# Altium PCB PadaukAudioBoard.PcbDoc
Units mm, origin at the board's own origin, x right, y up, seen from the top; angles counter-clockwise.
Board outline 98.99 x 99.67 mm, 2 copper layers (Top Layer, Bottom Layer); 52 components, 39 nets, 212 pads, 26 vias.
Unrouted connection lines stored in the file: 2.
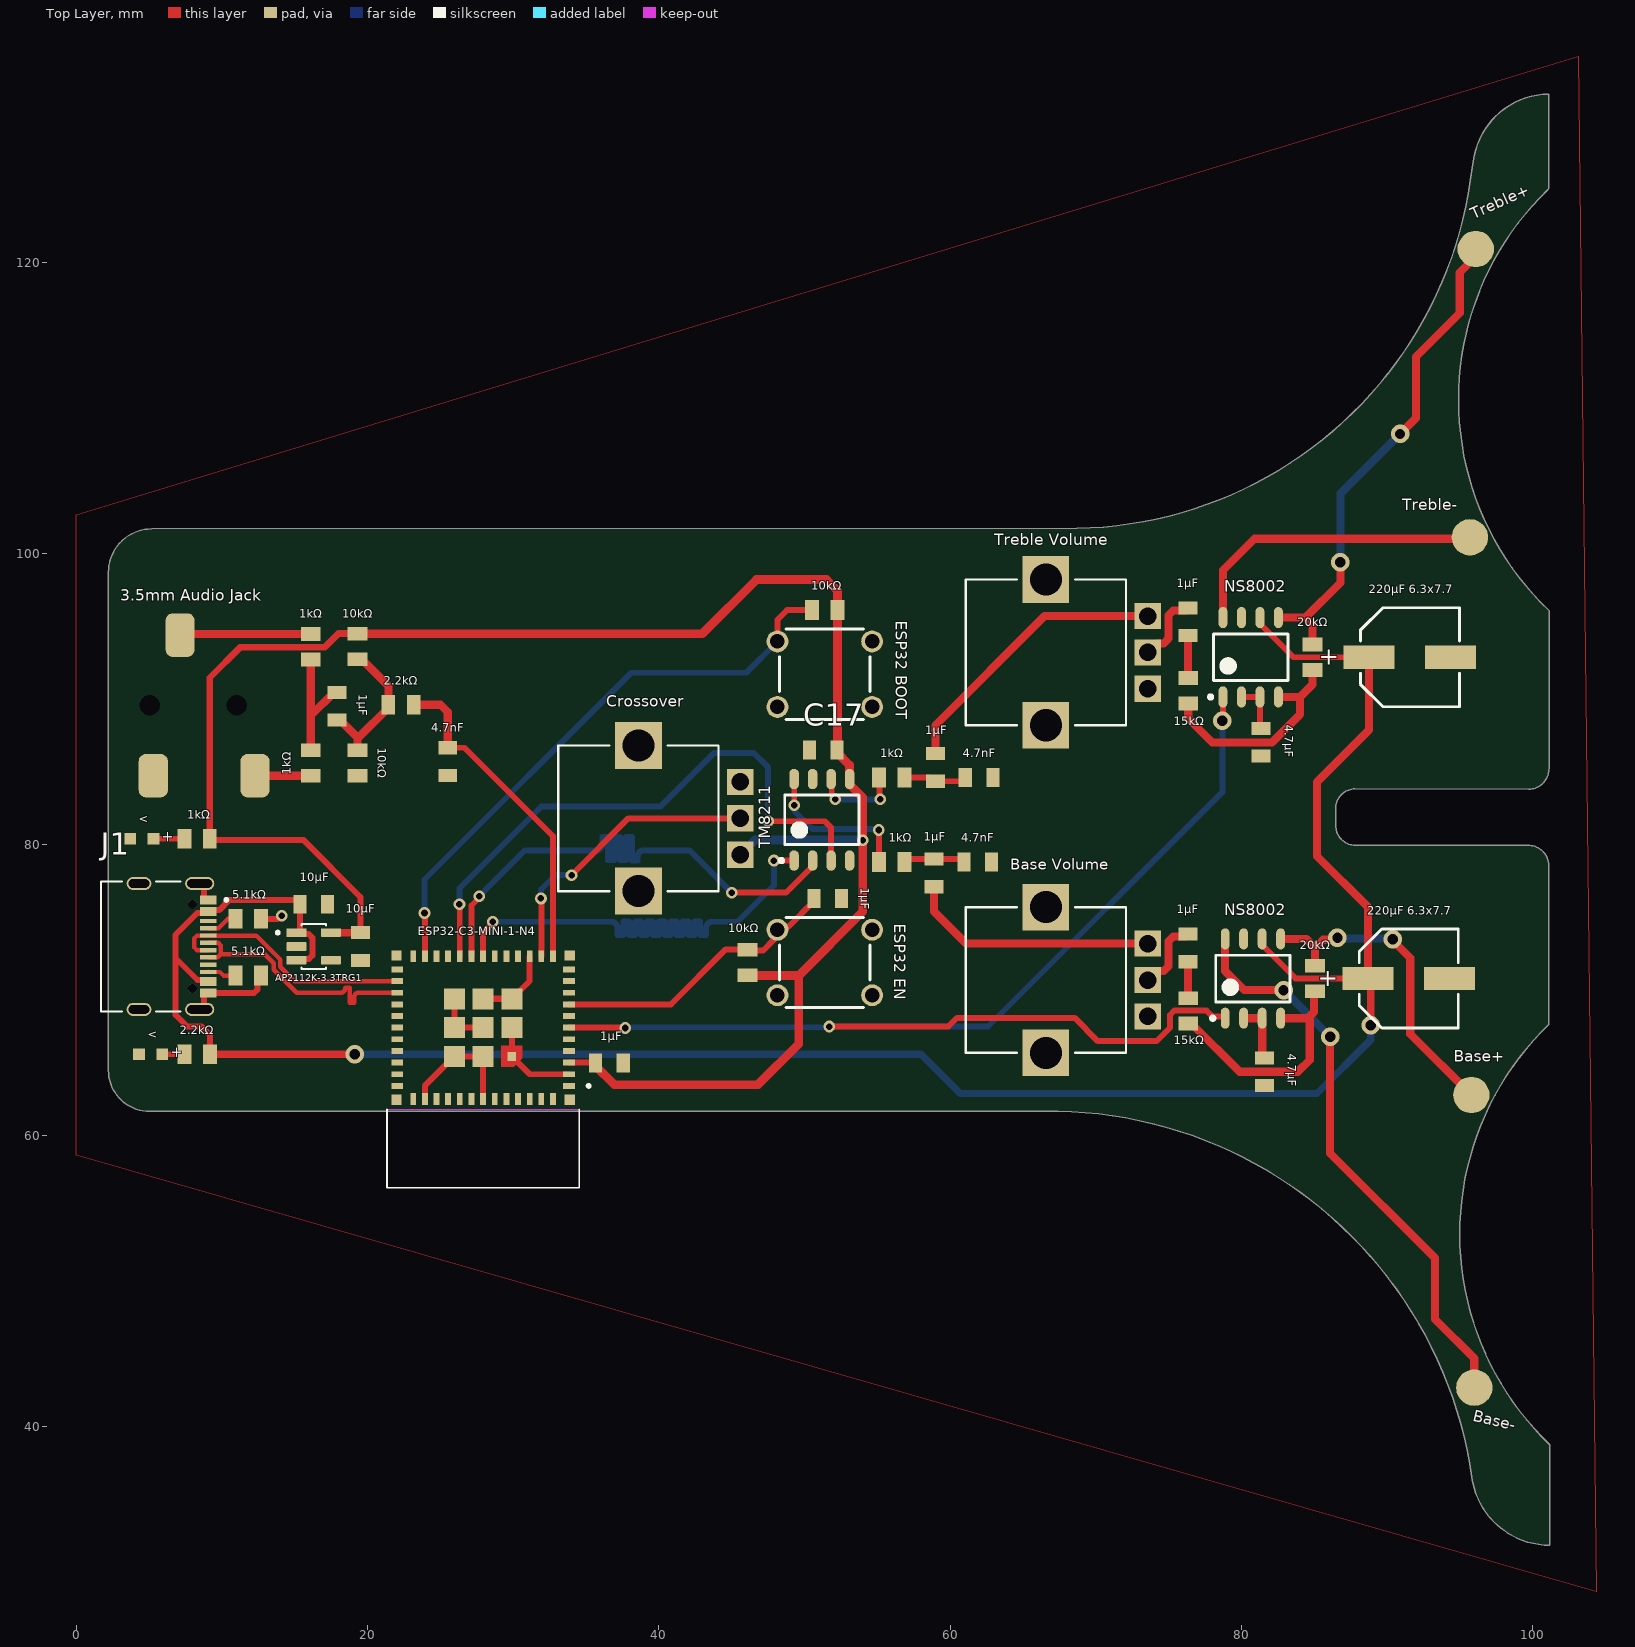
[diagram p0: Top Layer view]
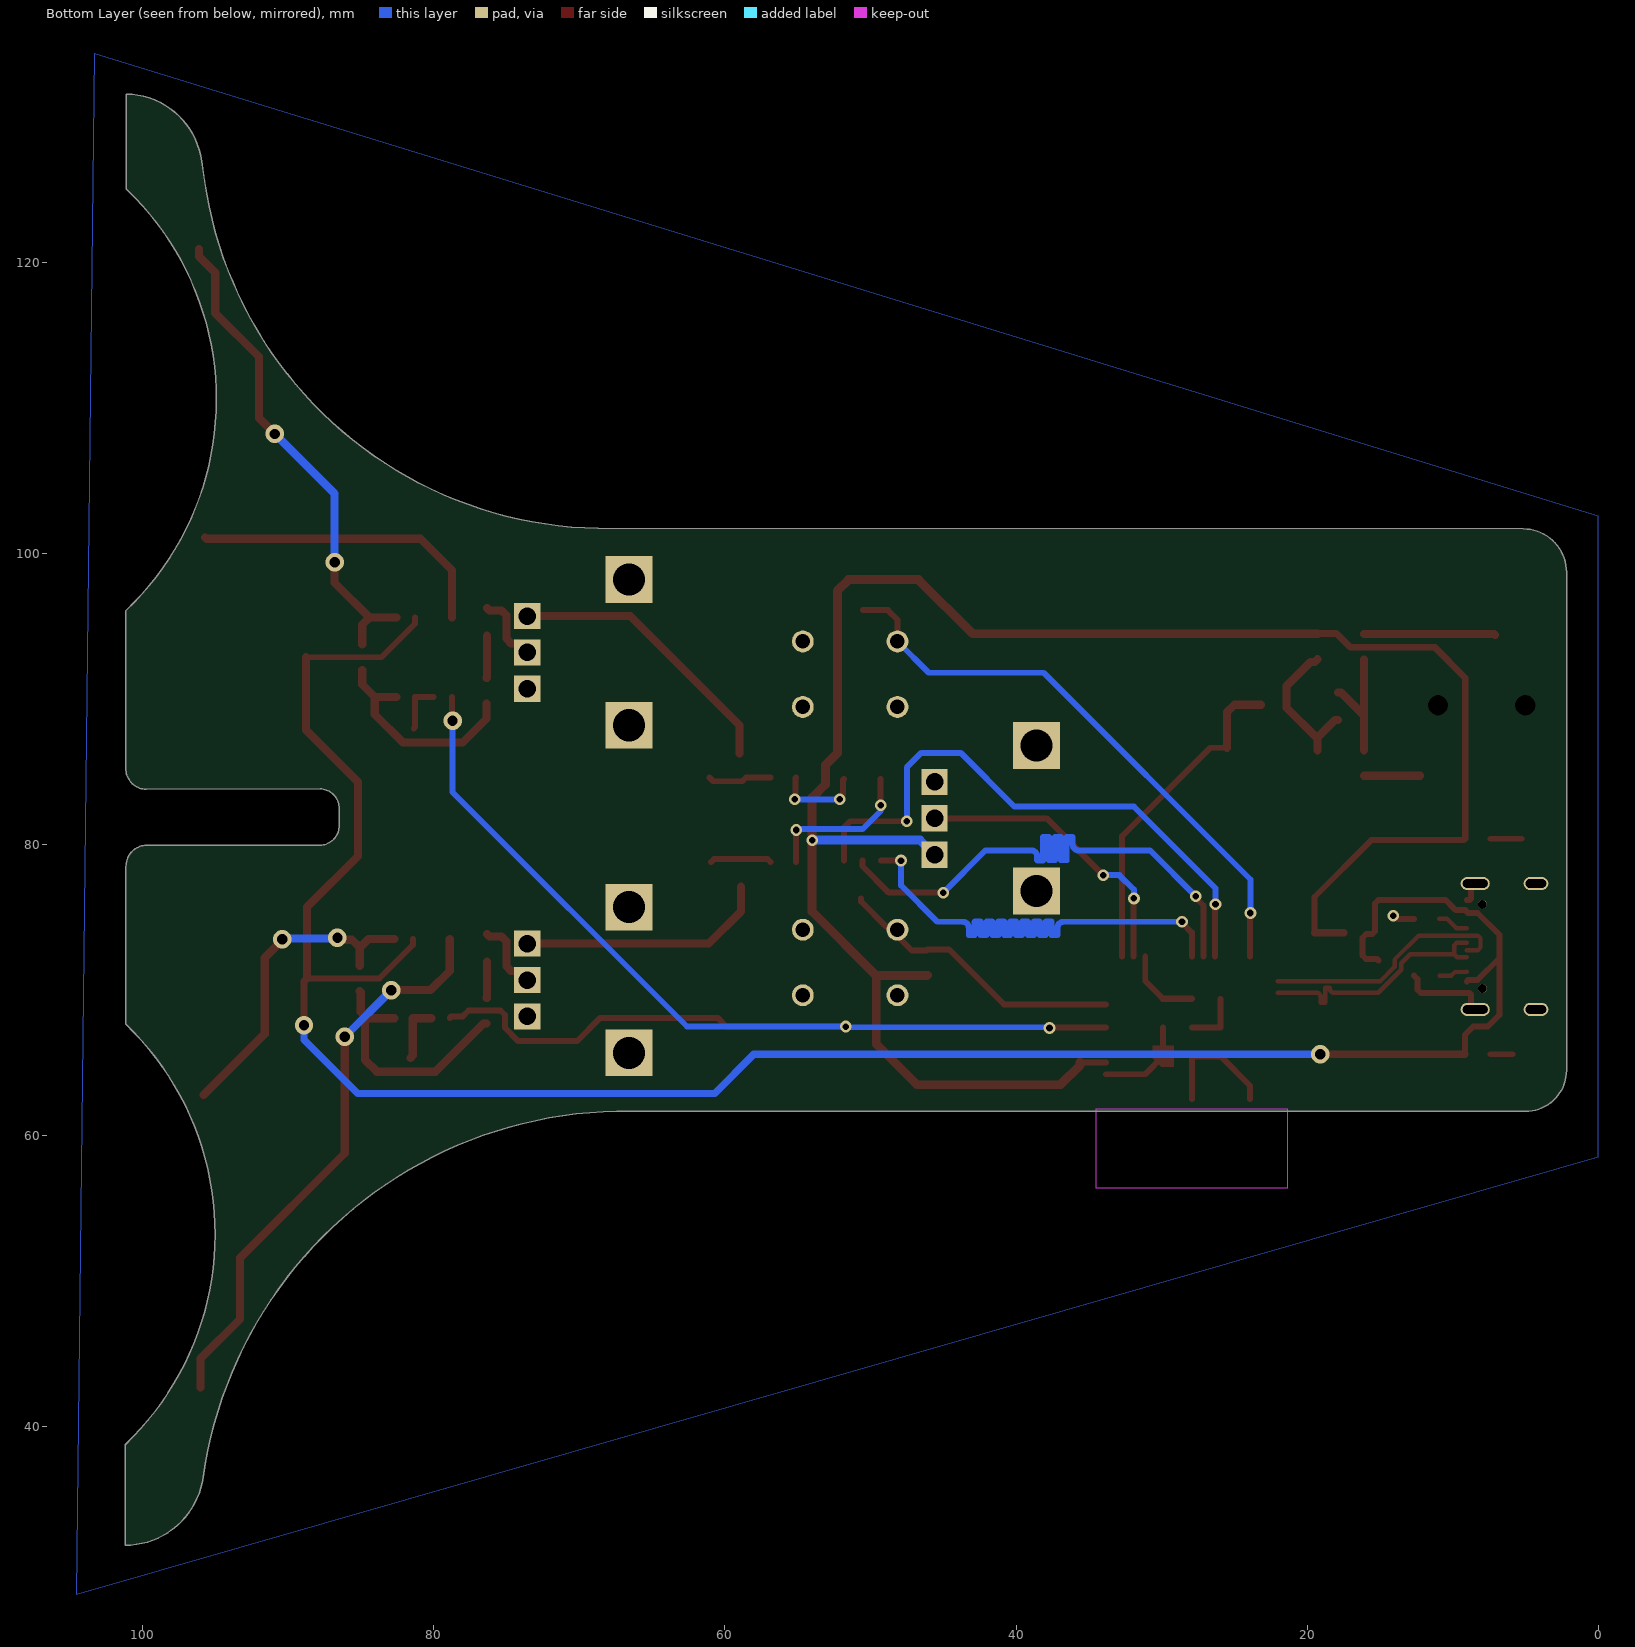
[diagram p1: Bottom Layer view, seen from below]
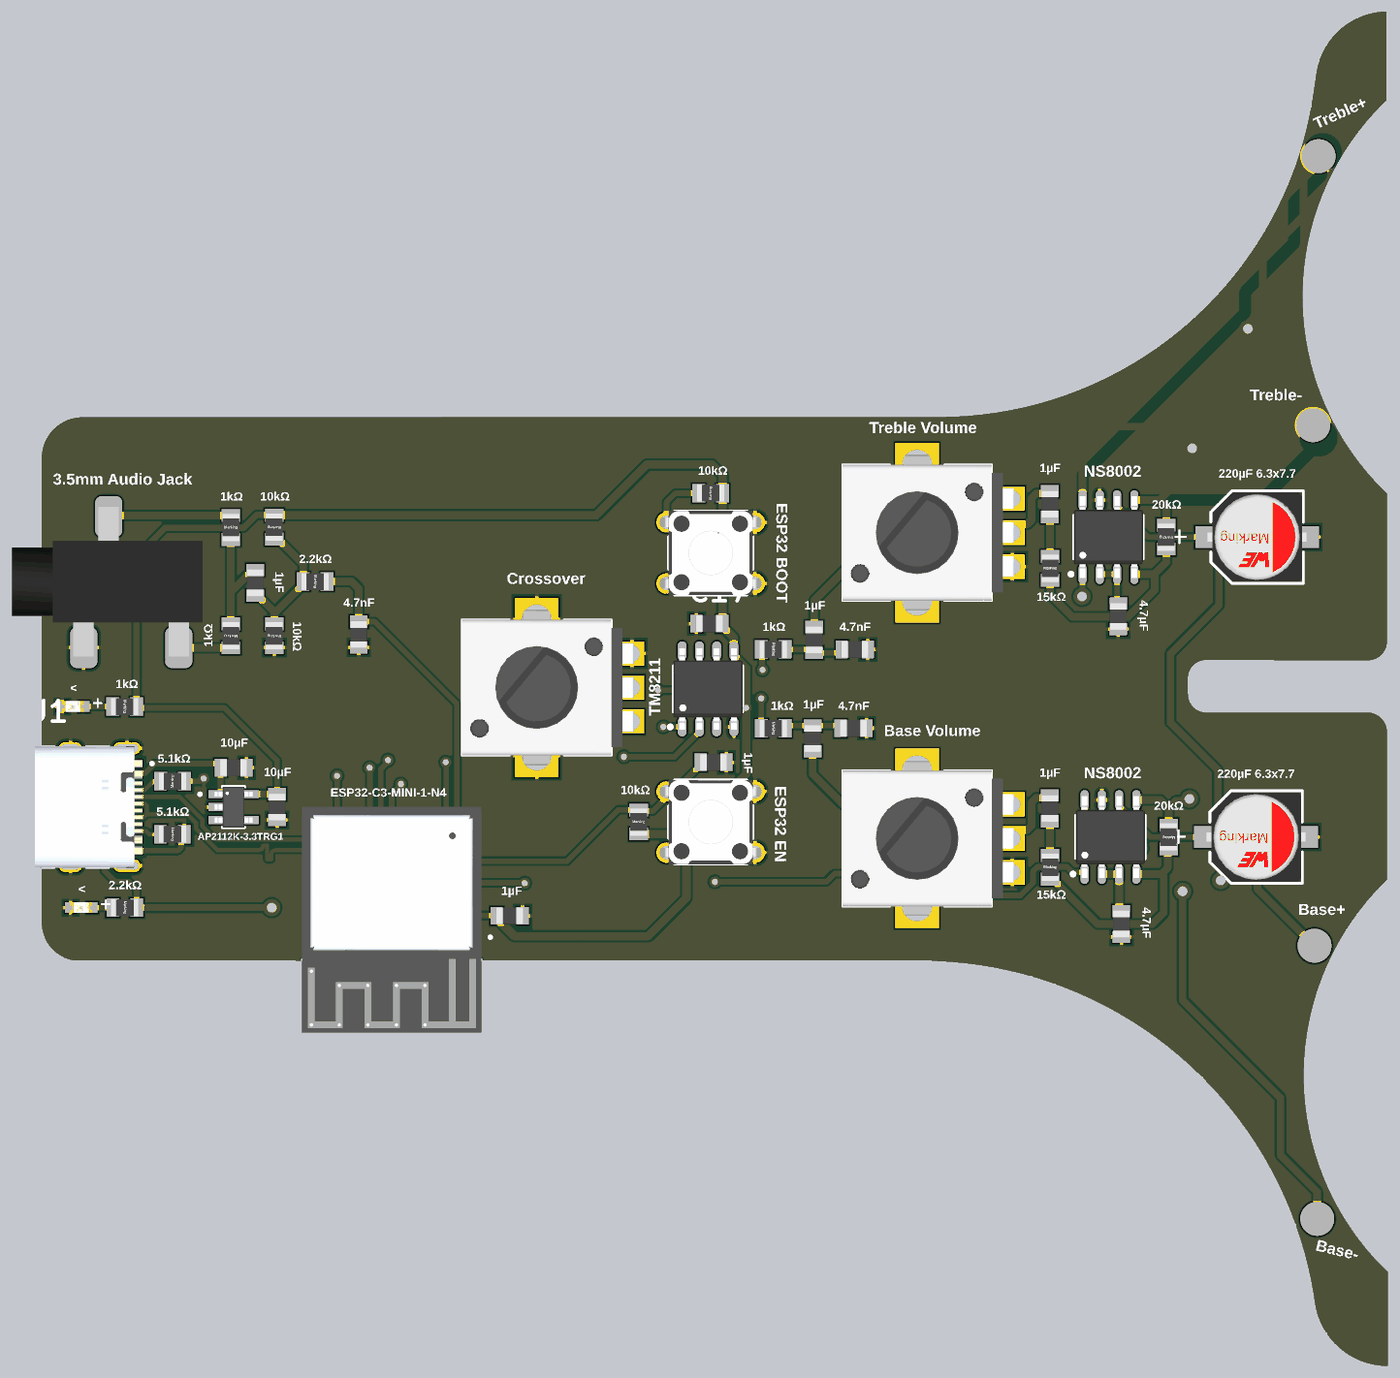
[diagram p2: 3D render of the assembled board from above, using the file's embedded part models]

## Layer stack, top to bottom
Top Solder: solder mask 0.0102, Solder Resist, Dk 3.5
Top Layer: signal copper 0.0356
Dielectric 1: dielectric 0.32, FR-4, Dk 4.8
Bottom Layer: signal copper 0.0356
Bottom Solder: solder mask 0.0102, Solder Resist, Dk 3.5

## Board outline
5.012,61.68 67.41,61.689 cw(c66.864,32.437) 95.828,36.561 ccw(c101.203,37.296) 101.183,31.872 101.183,38.784 101.182,38.785 cw(c114.999,53.245) 101.129,67.653 101.129,75.284 101.127,78.482 ccw(c99.676,78.505) 99.696,79.957 87.8,79.957 cw(c87.819,81.284) 86.492,81.305 86.485,81.312 86.485,82.474 cw(c87.812,82.495) 87.793,83.822 99.74,83.797 ccw(c99.72,85.208) 101.131,85.231 101.131,96.069 101.1,96.1 cw(c114.917,110.56) 101.047,124.969 101.101,125.023 101.101,131.543 ccw(c101.192,126.24) 95.932,126.929 95.733,125.605 cw(c68.189,129.527) 68.709,101.71 5.172,101.68 ccw(c5.172,98.7) 2.192,98.7 2.192,64.5 ccw(c5.012,64.5)

## Design rules (kind name [scope] priority, off if disabled: settings)
Clearance [All] p1: gap=0.152 ignorepadtopadclearanceinfootprint=FALSE
Height [All] p1: minheight=0 maxheight=50.8 prefheight=12.7
PolygonConnect [All] p1: connectstyle=Relief reliefconductorwidth=0.254 reliefentries=4 polygonreliefangle="90 Angle" airgapwidth=0.254
RoutingVias [All] p1: holewidth=0.711 width=1.27 viastyle="Through Hole" minholewidth=0.711 minwidth=1.27 maxholewidth=0.711 maxwidth=1.27
SolderMaskExpansion [All] p1: expansion=0.102 istentingtop=FALSE
SupplyNets "Schematic Supply Nets_2" [InNet('3V3')] p1: voltage=0.000
SupplyNets "Schematic Supply Nets_1" [InNet('GND')] p2: voltage=0.000
SupplyNets "Schematic Supply Nets" [InNet('5V')] p3: voltage=0.000
Width [All] p1: maxlimit=0.762 minlimit=0.152 preferedwidth=0.203
29 further rules are at their usual default settings.

## Classes and differential pairs
component class PadaukAudioBoard: 1kΩ 1µF 2.2kΩ "3.5mm Audio Jack" 4.7nF 4.7µF 5.1kΩ 10kΩ 10µF 15kΩ 20kΩ "220µF 6.3x7.7" < AP2112K-3.3TRG1 "Base Volume" Base+ Base- C17 Crossover "ESP32 BOOT" "ESP32 EN" ESP32-C3-MINI-1-N4 J1 NS8002 TM8211 "Treble Volume" Treble+ Treble-

## Components (designator, comment, footprint, x,y, rotation, side; value= is the part's Value field where it differs from the comment)
1kΩ "1kΩ" WRIS-PSMB_0805_H=0.22mm 55.992,84.6 r180 top (schematic designator R17)
1kΩ "1kΩ" WRIS-PSMB_0805_H=0.22mm 55.992,78.8 r180 top (schematic designator R16)
1kΩ "1kΩ" WRIS-PSMB_0805_H=0.22mm 8.282,80.4 r180 top (schematic designator R14)
1kΩ "1kΩ" WRIS-PSMB_0805_H=0.22mm 16.092,85.6 r90 top (schematic designator R6)
1kΩ "1kΩ" WRIS-PSMB_0805_H=0.22mm 16.092,93.575 r270 top (schematic designator R5)
1µF "1µF" WCAP-CSGP_0805_H=0.8mm_Reflow 36.6,65 r180 top (schematic designator C18)
1µF "1µF" WCAP-CSGP_0805_H=0.8mm_Reflow 51.592,76.3 r0 top (schematic designator C19)
1µF "1µF" WCAP-CSGP_0805_H=0.8mm_Reflow 76.328,95.294 r270 top (schematic designator C13)
1µF "1µF" WCAP-CSGP_0805_H=0.8mm_Reflow 76.328,72.903 r270 top (schematic designator C12)
1µF "1µF" WCAP-CSGP_0805_H=0.8mm_Reflow 58.892,78.05 r90 top (schematic designator C7)
1µF "1µF" WCAP-CSGP_0805_H=0.8mm_Reflow 58.992,85.3 r270 top (schematic designator C6)
1µF "1µF" WCAP-CSGP_0805_H=0.8mm_Reflow 17.892,89.5 r90 top (schematic designator C3)
2.2kΩ "2.2kΩ" WRIS-PSMB_0805_H=0.22mm 22.292,89.6 r180 top (schematic designator R15)
2.2kΩ "2.2kΩ" WRIS-PSMB_0805_H=0.22mm 8.292,65.6 r180 top (schematic designator R12)
"3.5mm Audio Jack" "PJ-320B Audio Jack" "PJ-320B Audio Jack" 7.051,87.4 r270 top (schematic designator "PJ-320B Audio Jack")
4.7nF "4.7nF" WCAP-CSGP_0805_H=0.8mm_Reflow 61.992,84.6 r0 top (schematic designator C16)
4.7nF "4.7nF" WCAP-CSGP_0805_H=0.8mm_Reflow 61.892,78.8 r0 top (schematic designator C15)
4.7nF "4.7nF" WCAP-CSGP_0805_H=0.8mm_Reflow 25.5,85.7 r270 top (schematic designator C14)
4.7µF "4.7µF" WCAP-CSGP_0805_H=0.8mm_Reflow 81.365,87.031 r270 top (schematic designator C9)
4.7µF "4.7µF" WCAP-CSGP_0805_H=0.8mm_Reflow 81.592,64.4 r270 top (schematic designator C8)
5.1kΩ "5.1kΩ" WRIS-PSMB_0805_H=0.22mm 11.792,71 r180 top (schematic designator R2)
5.1kΩ "5.1kΩ" WRIS-PSMB_0805_H=0.22mm 11.8,74.9 r0 top (schematic designator R1)
10kΩ "10kΩ" WRIS-PSMB_0805_H=0.22mm 51.392,96.1 r0 top (schematic designator R19)
10kΩ "10kΩ" WRIS-PSMB_0805_H=0.22mm 46.092,71.9 r270 top (schematic designator R18)
10kΩ "10kΩ" WRIS-PSMB_0805_H=0.22mm 19.292,85.6 r90 top (schematic designator R4)
10kΩ "10kΩ" WRIS-PSMB_0805_H=0.22mm 19.292,93.6 r90 top (schematic designator R3)
10µF "10µF" WCAP-CSGP_0805_H=0.8mm_Reflow 19.492,73 r90 top (schematic designator C2)
10µF "10µF" WCAP-CSGP_0805_H=0.8mm_Reflow 16.292,75.9 r180 top (schematic designator C1)
15kΩ "15kΩ" WRIS-PSMB_0805_H=0.22mm 76.358,90.567 r270 top (schematic designator R9)
15kΩ "15kΩ" WRIS-PSMB_0805_H=0.22mm 76.358,68.574 r270 top (schematic designator R7)
20kΩ "20kΩ" WRIS-PSMB_0805_H=0.22mm 84.895,92.866 r90 top (schematic designator R10)
20kΩ "20kΩ" WRIS-PSMB_0805_H=0.22mm 85.067,70.8 r90 top (schematic designator R8)
"220µF 6.3x7.7" "220µF" WCAP-ASLI_D6.3H7.7 91.572,92.866 r180 top (schematic designator C11)
"220µF 6.3x7.7" "220µF" WCAP-ASLI_D6.3H7.7 91.5,70.8 r180 top (schematic designator C10)
< "Yellow, 2V" WL-SMCW_0603_H=0.25mm 4.492,80.4 r0 top (schematic designator D2)
< "Yellow, 2V" WL-SMCW_0603_H=0.25mm 5.092,65.6 r0 top (schematic designator D1)
AP2112K-3.3TRG1 "AP2112K-3.3TRG1" SOT95P285X140-5N 16.292,73 r0 top (schematic designator U2)
"Base Volume" "Pot-B10K" PTV09A-4025F-B103 66.572,70.697 r90 top (schematic designator "Volume Pot Base B10K")
Base+ "SquarePad" Pad3x3mm#1 95.8,62.8 r90 top (schematic designator OUT-BASE-PLUS)
Base- "SquarePad" Pad3x3mm#1 96,42.7 r0 top (schematic designator OUT-BASE-MIN)
C17 "1µF" WCAP-CSGP_0805_H=0.8mm_Reflow 51.292,86.5 r0 top
Crossover "Pot-B10K" PTV09A-4025F-B103 38.592,81.8 r90 top (schematic designator "Crossover Pot B10K")
"ESP32 BOOT" "430156043726" 4301x60437x6 51.392,91.7 r0 top (schematic designator S1)
"ESP32 EN" "430156043726" 4301x60437x6 51.392,71.9 r0 top (schematic designator S2)
ESP32-C3-MINI-1-N4 "ESP32-C3-MINI-1-N4" XCVR_ESP32-C3-MINI-1-N4 27.925,64.725 r180 top (schematic designator U1)
J1 "TYPE-C-31-M-12" HRO_TYPE-C-31-M-12 4.292,73 r270 top
NS8002 "NS8002" NS8002 80.643,92.866 r90 top (schematic designator "NS8002 Treble")
NS8002 "NS8002" NS8002 80.792,70.8 r90 top (schematic designator "NS8002 Base")
TM8211 "TM8211" TM8211 51.192,81.7 r90 top
"Treble Volume" "Pot-B10K" PTV09A-4025F-B103 66.572,93.194 r90 top (schematic designator "Volume Pot Treble B10K")
Treble+ "SquarePad" Pad3x3mm#2 99.292,110.377 r90 top (schematic designator OUT-TREBLE-PLUS)
Treble- "SquarePad" Pad3x3mm#3 97.892,74.079 r90 top (schematic designator OUT-TREBLE-MIN)

## Footprints (in the part's own frame and the unit in brackets; to place one, negate y for a bottom-side part, rotate by r counter-clockwise, add the part's x,y. Pads: shape width x height; smd on the part's side, far side on the other; paste and mask are expansions set on the pad)
4301x60437x6 [mm] "6x6mm Tact Switch, THT version"
  round 1.5 hole 1: 1(-3.25,2.25) 2(-3.25,-2.25) 3(3.25,2.25) 4(3.25,-2.25)
  silkscreen extent -3.1,-3.1 3.1,3.1, body extent -3.95,-3.1 3.95,3.1, height 4.35
HRO_TYPE-C-31-M-12 [mm]
  rect 0.6x1.14 smd mask+0.05: A1_B12(-3.2,4.75) A4_B9(-2.4,4.75) B1_A12(3.2,4.75) B4_A9(2.4,4.75)
  rect 0.3x1.14 smd mask+0.05: A5(-1.25,4.75) A6(-0.25,4.75) A7(0.25,4.75) A8(1.25,4.75) B5(1.75,4.75) B6(0.75,4.75) B7(-0.75,4.75) B8(-1.75,4.75)
  oval 0.9x2 hole 0.6 slot 1.7 at 90 deg: S1(-4.325,4.17) S2(4.325,4.17)
  oval 0.9x1.7 hole 0.6 slot 1.4 at 90 deg: S3(-4.325,0) S4(4.325,0)
  round 0.6 hole 0.6 unplated: ""(-2.89,3.68) ""(2.89,3.68)
  silkscreen extent -4.47,-2.6 4.47,6.1, body extent -4.47,-2.6 4.47,5.31, height 3.31
NS8002 [mm] "Class AB 1.8W x 1 @ 4Ω 3V ~ 5.25V SOP-8_EP_150mil Audio Power OpAmps RoHSm, IPC Medium Density"
  oval 1.45x0.6 smd: 1(-2.725,1.905) 2(-2.725,0.635) 3(-2.725,-0.635) 4(-2.725,-1.905) 5(2.725,-1.905) 6(2.725,-0.635) 7(2.725,0.635) 8(2.725,1.905)
  silkscreen extent -2.85,-2.55 1.6,2.88, body extent -3,-2.55 3,2.55, height 1.7
Pad3x3mm#1 [mm]
  round 2.5 smd: 1(0,0)
Pad3x3mm#2 [mm]
  round 2.5 smd: 1(10.523,3.192)
Pad3x3mm#3 [mm]
  round 2.5 smd: 1(27.021,2.192)
"PJ-320B Audio Jack" [mm]
  rrect50% 3x2 smd: 1(2.667,-1.778) 2(-6.985,0.063) 3(2.667,5.207)
  round 0 hole 1.4: 3(-2.159,3.968) 3(-2.159,-2.032)
  body extent -7.69,-7.05 3.32,6.95, height 5
PTV09A-4025F-B103 [mm]
  rect 1.8x1.8 / inner round 1.8 / far side rect 1.8x1.8 hole 1.2: 1(-2.5,-7) 2(0,-7) 3(2.5,-7)
  rect 3.216x3.216 / inner round 3.216 / far side rect 3.216x3.216 hole 2.2: S1(-5,0) S2(5,0)
  silkscreen extent -5,-5.5 5,5.5, body extent -5.7,-7.15 5.7,5.5, height 25.5
SOT95P285X140-5N [mm]
  rrect15% 1.35x0.6 smd: 1(-1.185,0.95) 2(-1.185,0) 3(-1.185,-0.95) 4(1.185,-0.95) 5(1.185,0.95)
  silkscreen extent -2.57,-1.55 0.85,1.55, body extent -1.4,-1.5 1.4,1.5, height 1.4
TM8211 [mm] "16-Bit SOP-8_150mil Digital To Analog Converter (DAC)"
  oval 1.4x0.65 smd: 1(-2.8,1.905) 2(-2.8,0.635) 3(-2.8,-0.635) 4(-2.8,-1.905) 5(2.8,-1.905) 6(2.8,-0.635) 7(2.8,0.635) 8(2.8,1.905)
  silkscreen extent -2.92,-2.55 1.7,2.9, body extent -3,-2.55 3,2.55, height 1.7
WCAP-ASLI_D6.3H7.7 [mm] "Aluminium Electrolytic V-Chip SMT Capacitors, 6.3x7.7mm"
  rect 3.5x1.6 smd: 1(2.8,0) 2(-2.8,0)
  silkscreen extent -3.4,-3.4 3.4,3.4, body extent -3.65,-3.3 3.65,3.3, height 7.7
WCAP-CSGP_0805_H=0.8mm_Reflow [mm] "Ceramic Capacitors, body 2x1.25mm"
  rect 0.9x1.3 smd: 1(-0.95,0) 2(0.95,0)
  body extent -1,-0.62 1,0.63, height 0.8
WL-SMCW_0603_H=0.25mm [mm] "SMD Mono-color Chip LED, body 1.6x0.8mm"
  rect 0.8x0.8 smd: 1(-0.8,0) 2(0.8,0)
  body extent -0.8,-0.4 0.8,0.4, height 0.25
WRIS-PSMB_0805_H=0.22mm [mm] "Metal Plate Resistor, SMT, body size 2x1.25mm"
  rect 0.95x1.36 smd: 1(-0.875,0) 2(0.875,0)
  body extent -1,-0.62 1,0.63, height 0.22
XCVR_ESP32-C3-MINI-1-N4 [mm]
  rect 0.8x0.4 smd: 1(-5.9,1.3) 2(-5.9,0.5) 3(-5.9,-0.3) 4(-5.9,-1.1) 5(-5.9,-1.9) 6(-5.9,-2.7) 7(-5.9,-3.5) 8(-5.9,-4.3) 9(-5.9,-5.1) 10(-5.9,-5.9) 11(-5.9,-6.7) 25(5.9,-6.7) 26(5.9,-5.9) 27(5.9,-5.1) 28(5.9,-4.3) 29(5.9,-3.5) 30(5.9,-2.7) 31(5.9,-1.9) 32(5.9,-1.1) 33(5.9,-0.3) 34(5.9,0.5) 35(5.9,1.3)
  rect 0.4x0.8 smd: 12(-4.8,-7.6) 13(-4,-7.6) 14(-3.2,-7.6) 15(-2.4,-7.6) 16(-1.6,-7.6) 17(-0.8,-7.6) 18(0,-7.6) 19(0.8,-7.6) 20(1.6,-7.6) 21(2.4,-7.6) 22(3.2,-7.6) 23(4,-7.6) 24(4.8,-7.6) 36(4.8,2.2) 37(4,2.2) 38(3.2,2.2) 39(2.4,2.2) 40(1.6,2.2) 41(0.8,2.2) 42(0,2.2) 43(-0.8,2.2) 44(-1.6,2.2) 45(-2.4,2.2) 46(-3.2,2.2) 47(-4,2.2) 48(-4.8,2.2)
  rect 0.6x0.6 smd paste-1 mask+0: 49_1(-1.975,-0.725)
  rect 1.45x1.45 smd: 49_2(0,-0.725) 49_3(1.975,-0.725) 49_4(1.975,-2.7) 49_5(1.975,-4.675) 49_6(0,-4.675) 49_7(-1.975,-4.675) 49_8(-1.975,-2.7) 49_9(0,-2.7)
  rect 0.7x0.7 smd: 50(5.95,2.25) 51(5.95,-7.65) 52(-5.95,-7.65) 53(-5.95,2.25)
  Top Layer region: -1.25,-1.45 -2.7,-1.45 -2.7,-0.6 -2.1,0 -1.25,0
  Keep-Out Layer region: 6.6,2.9 -6.6,2.9 -6.6,8.3 6.6,8.3
  Keep-Out Layer region: 6.6,2.9 -6.6,2.9 -6.6,8.3 6.6,8.3
  silkscreen extent -7.35,1.2 6.6,8.3, body extent -6.6,-8.3 6.6,8.3, height 2.55

## Part data
1kΩ 1kΩ 1kΩ 1kΩ 1kΩ 2.2kΩ 2.2kΩ 5.1kΩ 5.1kΩ 10kΩ 10kΩ 10kΩ 10kΩ 15kΩ 15kΩ 20kΩ 20kΩ: library part 580060720008, "WRIS-PSMB Metal Plate Resistors, size 0805, 10mOhm, +/-1%, 0.5W", Operating Temperature="-55 to +155degC", Rated Current=7.07A, Rated Power=0.5W, Resistance=10mOhm, Resistance Tolerance=+/-1%, Temperature Coefficient of Resistance=+/-100ppm/degC, ComponentLink1Description=Manufacturer, ComponentLink1URL=http://www.we-online.de, ComponentLink2Description=Datasheet, ComponentLink2URL=https://katalog.we-online.com/pbs/datasheet/580060720008.pdf, Height=0.22mm, Length=2mm, Mounting Technology=SMT, Packaging="Tape and Reel", Part Number=580060720008, Published Date="September 2019", Publisher="Wurth Elektronik", Size=0805, Technical Reference=MB0805R010F102KAATP0000, Width=1.25mm
1µF 1µF 1µF 1µF 1µF 1µF 1µF 4.7nF 4.7nF 4.7nF 4.7µF 4.7µF 10µF 10µF C17: library part 885012007021, "WCAP-CSGP General Purpose Ceramic Capacitors, size 0805, 1nF, +/-5%, 16VDC", Capacitance=1nF, Capacitance Tolerance=+/-5%, Isolation Resistance=>=10GOhm, Operating Temperature="-55 to +125degC", Rated Voltage=16VDC, Ceramic Type=NP0, ComponentLink1Description=Manufacturer, ComponentLink1URL=http://www.we-online.de, ComponentLink2Description=Datasheet, ComponentLink2URL=https://katalog.we-online.com/pbs/datasheet/885012007021.pdf, Dissipation Factor=Q>=1000, Height="0.8mm +/-0.10mm", Mounting Technology=SMD, Packaging="Tape and Reel", Part Number=885012007021, Published Date="August 2019", Publisher="Wurth Elektronik", Size=0805, Technical Reference=NP00805102J016DFCT10000
"220µF 6.3x7.7" "220µF 6.3x7.7": library part 865080145010, "WCAP-ASLI Aluminum Electrolytic Capacitor, V-Chip, SMT, 6.3mm x 7.7mm, 330μF, 6.3V", Capacitance=330μF, Leakage Current=20.79μA, Manufacturer="Wurth Elektronik", Max Operating Temperature=105°C, Min Operating Temperature=-55°C, Rated Voltage (DC)=6.3V, Ripple Current=275mA, Category="Aluminum Electrolytic Capacitors", ComponentLink1Description="Website Link", ComponentLink1URL=https://www.we-online.com/redexpert/article/865080145010?ad, ComponentLink2Description="Datasheet Link", ComponentLink2URL=https://www.we-online.com/redexpert/spec/865080145010?ad, Diameter=6.3mm, Dissipation Factor=24%, Endurance=2000h, Height=7.7mm, Impedance=360mΩ, Manufacturer Part Number=865080145010, Match Code=WCAP-ASLI, Mount="Surface Mount", Packaging="Tape and Reel"
< <: library part 150060YS75020, "WL-SMCW SMT Mono-color Chip LED Waterclear, size 0603, Yellow, 2V, 140deg", Emitting Color=Yellow, Forward Voltage typ.=2V, Operating Temperature="-40 to +85degC", Chip Technology=AlInGaP, ComponentLink1Description=Manufacturer, ComponentLink1URL=http://www.we-online.de, ComponentLink2Description=Datasheet, ComponentLink2URL=https://www.we-online.com/catalog/datasheet/150060YS75020.pdf, Dominant Wavelength typ.=590nm, Luminous Intensity typ.=130mcd, Mounting Technology=SMT, Packaging="Tape and Reel", Part Number=150060YS75020, Peak Wavelength typ.=595nm, Published Date="March 2020", Publisher="Wurth Elektronik", Size=0603, Viewing Angle=140deg
AP2112K-3.3TRG1: "Linear Voltage Regulator IC Positive Fixed 1 Output 600mA SOT-25", Package="SOT-753 Diodes Inc.", Availability="In Stock", Check_prices=https://www.snapeda.com/parts/AP2112K-3.3TRG1/Diodes+Inc./view-part/?ref=eda, MF="Diodes Inc.", MP=AP2112K-3.3TRG1, Price=None, Purchase-URL=https://pricing.snapeda.com/search/part/AP2112K-3.3TRG1/?ref=eda, SnapEDA_Link=https://www.snapeda.com/parts/AP2112K-3.3TRG1/Diodes+Inc./view-part/?ref=snap
"Base Volume" Crossover "Treble Volume": library part RV09AF-40-20K-A10K, "PC Mount Black Shaft Potentiometers Audio 9mm 10K", Package=None, Check_prices=https://www.snapeda.com/parts/RV09AF-40-20K-A10K/Alpha/view-part/?ref=eda, MF="Alpha Taiwan", MP=RV09AF-40-20K-A10K, SnapEDA_Link=https://www.snapeda.com/parts/RV09AF-40-20K-A10K/Alpha/view-part/?ref=snap
"ESP32 BOOT" "ESP32 EN": "WS-TATV THT Tact Switch 6x6mm, height 4.3mm, 260gf", Operating Temperature="-40 to +85degC", Rated Current=50mA, Rated Voltage=12VDC, ComponentLink1Description=Manufacturer, ComponentLink1URL=http://www.we-online.de, ComponentLink2Description=Datasheet, ComponentLink2URL=https://katalog.we-online.com/em/datasheet/430156043726.pdf, Contact Material="Stainless Steel", Contact Plating=Silver, Height=4.3mm, Mounting Technology=THT, Operation Force=260gf, Packaging=Bulk, Part Number=430156043726, Published Date="September 2019", Publisher="Wurth Elektronik", Terminal Material="Copper Alloy", Terminal Plating=Silver, Washable=No
ESP32-C3-MINI-1-N4: Package=None, Availability=Unavailable, MF="{'manufacturer': u'Espressif Systems'}", MP=ESP32-C3-MINI-1-N4, Price=None
J1: "USB Connectors 24 Receptacle 1 8.94*7.3mm RoHS", Package=Package, Check_prices=https://www.snapeda.com/parts/TYPE-C-31-M-12/HRO+Electronics+Co.%252C+Ltd./view-part/?ref=eda, MF="HRO Electronics Co., Ltd.", MP=TYPE-C-31-M-12, SnapEDA_Link=https://www.snapeda.com/parts/TYPE-C-31-M-12/HRO+Electronics+Co.%252C+Ltd./view-part/?ref=snap

## Via types
v1: diameter 0.8, hole 0.45, Top Layer to Bottom Layer, tented both sides, 17 vias
v2: diameter 1.27, hole 0.711, Top Layer to Bottom Layer, tented both sides, 9 vias

## Nets (pads, with @x,y where several pads share a name; then routed paths per layer and width w, separated by ;. In a path a pad name is that pad's centre, name@x,y a point inside that pad or via, vN(x,y) a via of type N, cw(c..) or ccw(c..) an arc to the next point about the centre after c; other vN are vias at no path point)
3V3: 1kΩ.1@9.157,80.4 1µF.2@35.65,65 10kΩ.2@19.292,94.475 10kΩ.2@46.092,71.025 10kΩ.2@52.267,96.1 10µF.2@19.492,73.95 AP2112K-3.3TRG1.5 C17.2 Crossover.1 ESP32-C3-MINI-1-N4.3 TM8211.5 | length 137.5
  Top Layer w0.406: 1kΩ.1@9.157,80.4 9.257,80.3 15.6,80.3 19.5,76.4 19.5,73.958 10µF.2@19.492,73.95 ; ESP32-C3-MINI-1-N4.3 1µF.2@35.6,65.025
  Top Layer w0.457: 1kΩ.1@9.157,80.4 9.157,91.457 11.256,93.556 17.056,93.556 18,94.5 19.267,94.5 10kΩ.2@19.292,94.475
  Top Layer w0.508: AP2112K-3.3TRG1.5 10µF.2@19.492,73.95
  Top Layer w0.61: 10kΩ.2@19.292,94.475 42.975,94.475 46.7,98.2 51.5,98.2 52.267,97.433 52.267,96.1 52.254,96.087 52.254,86.513 C17.2 52.242,86.3 53.089,85.453 53.089,84.508 TM8211.5 53.097,84.125 54,83.222 v1(54,80.3) 54,75.4 49.6,71 ; 1µF.2@35.6,65.025 35.6,64.85 36.95,63.5 46.8,63.5 49.6,66.3 49.6,71 ; 10kΩ.2@46.092,71.025 46.117,71 49.6,71
  Bottom Layer w0.61: Crossover.1 46.592,80.3 v1(54,80.3)
5V: 2.2kΩ.1@9.167,65.6 10µF.2@15.342,75.9 "220µF 6.3x7.7.1" AP2112K-3.3TRG1.1 AP2112K-3.3TRG1.3 J1.A4_B9 J1.B4_A9 NS8002.6 | length 156.9
  Top Layer w0.406: J1.B4_A9 8.945,70.697 8.312,70.697 6.8,72.209 ; 2.2kΩ.1@9.167,65.6 9.167,66.933 8.6,67.5 7.6,67.5 6.8,68.3 6.8,72.209 ; AP2112K-3.3TRG1.3 15.204,72.147 15.962,72.147 16.2,72.385 16.2,73.6 15.947,73.853 15.536,73.853 15.342,74.047 15.342,75.953 15.095,76.2 10.5,76.2 9.797,75.497 9.139,75.497 8.945,75.303 8.303,75.303 6.8,73.8 6.8,72.209 ; NS8002.6@81.278,95.591 81.278,95.166 83.578,92.866 88.772,92.866 ; NS8002.6@81.427,73.525 81.427,73.1 83.727,70.8 88.7,70.8
  Top Layer w0.508: 2.2kΩ.1@9.167,65.6 v2(19.1,65.6) ; 88.7,70.8 88.9,70.6 v2(88.9,67.6)
  Top Layer w0.559: 88.7,70.8 88.7,75.7 85.2,79.2 85.2,84.3 88.772,87.872 88.772,92.866
  Bottom Layer w0.508: v2(19.1,65.6) 58,65.6 60.7,62.9 85.2,62.9 88.9,66.6 v2(88.9,67.6)
\A\M\P\_\E\N\: ESP32-C3-MINI-1-N4.6 NS8002.1 | length 87.7
  Top Layer w0.406: ESP32-C3-MINI-1-N4.6 37.675,67.425 v1(37.7,67.4) ; v1(51.7,67.5) 59.878,67.5 60.478,68.1 68.55,68.1 70.15,66.5 74.178,66.5 75.1,67.422 75.1,68.3 75.4,68.6 77.6,68.6 78,68.2 78.797,68.2 78.887,68.11 NS8002.1@78.887,68.075 ; v2@78.738,88.662 NS8002.1@78.738,90.141
  Bottom Layer w0.406: v1(37.7,67.4) 37.75,67.45 51.65,67.45 v1(51.7,67.5) 62.6,67.5 78.7,83.6 v2(78.7,88.5)
AMP_LCH: 1µF.1@76.328,96.244 "Treble Volume.2" | length 5
  Top Layer w0.559: 73.572,93.194 74.193,93.815 74.673,93.815 75,94.142 75,95.749 75.327,96.077 76.161,96.077 1µF.1@76.328,96.244
AMP_RCH: 1µF.1@76.328,73.853 "Base Volume.2" | length 5.1
  Top Layer w0.559: 73.572,70.697 74.193,71.317 74.673,71.317 75,71.645 75,73.358 75.327,73.686 76.161,73.686 1µF.1@76.328,73.853
AUDIO_IN: 2.2kΩ.1@23.167,89.6 4.7nF.1@25.5,86.65 ESP32-C3-MINI-1-N4.12 | length 23
  Top Layer w0.406: 4.7nF.1@25.5,86.65 26.65,86.65 32.725,80.575 ESP32-C3-MINI-1-N4.12
  Top Layer w0.559: 2.2kΩ.1@23.167,89.6 25,89.6 25.5,89.1 4.7nF.1@25.5,86.65
BCK: ESP32-C3-MINI-1-N4.18 TM8211.1 | length 40.1
  Top Layer w0.406: ESP32-C3-MINI-1-N4.18 27.925,73.947 28.6,74.622 v1(28.6,74.7) ; v1(47.9,78.9) TM8211.1
  Bottom Layer w0.406: v1(28.6,74.7) 36.135,74.7 36.744,74.7 cw(c36.744,74.294) 37.151,74.294 37.151,73.805 ccw(c37.171,73.805) 37.171,73.785 37.537,73.785 ccw(c37.537,73.805) 37.557,73.805 37.557,74.681 cw(c37.577,74.681) 37.577,74.702 37.943,74.702 cw(c37.943,74.681) 37.963,74.681 37.963,73.805 ccw(c37.984,73.805) 37.984,73.785 38.35,73.785 ccw(c38.35,73.805) 38.37,73.805 38.37,74.681 cw(c38.39,74.681) 38.39,74.702 38.756,74.702 cw(c38.756,74.681) 38.776,74.681 38.776,73.805 ccw(c38.797,73.805) 38.797,73.785 39.162,73.785 ccw(c39.162,73.805) 39.183,73.805 39.183,74.681 cw(c39.203,74.681) 39.203,74.702 39.569,74.702 cw(c39.569,74.681) 39.589,74.681 39.589,73.805 ccw(c39.609,73.805) 39.609,73.785 39.975,73.785 ccw(c39.975,73.805) 39.995,73.805 39.995,74.681 cw(c40.016,74.681) 40.016,74.702 40.382,74.702 cw(c40.382,74.681) 40.402,74.681 40.402,73.805 ccw(c40.422,73.805) 40.422,73.785 40.788,73.785 ccw(c40.788,73.805) 40.808,73.805 40.808,74.681 cw(c40.829,74.681) 40.829,74.702 41.194,74.702 cw(c41.194,74.681) 41.215,74.681 41.215,73.805 ccw(c41.235,73.805) 41.235,73.785 41.601,73.785 ccw(c41.601,73.805) 41.621,73.805 41.621,74.681 cw(c41.641,74.681) 41.641,74.702 42.007,74.702 cw(c42.007,74.681) 42.027,74.681 42.027,73.805 ccw(c42.048,73.805) 42.048,73.785 42.414,73.785 ccw(c42.414,73.805) 42.434,73.805 42.434,74.681 cw(c42.454,74.681) 42.454,74.702 42.82,74.702 cw(c42.82,74.681) 42.84,74.681 42.84,73.805 ccw(c42.861,73.805) 42.861,73.785 43.226,73.785 ccw(c43.226,73.805) 43.247,73.805 43.247,74.294 cw(c43.653,74.294) 43.653,74.7 44.827,74.7 45.4,74.7 47.9,77.2 v1(47.9,78.9)
BTN_BOOT: 10kΩ.1@50.517,96.1 "ESP32 BOOT.1" ESP32-C3-MINI-1-N4.23 | length 40.4
  Top Layer w0.406: v1(23.9,75.3) 23.922,75.278 23.922,72.328 ESP32-C3-MINI-1-N4.23 ; 48.142,93.95 48.142,95.442 48.8,96.1 10kΩ.1@50.517,96.1
  Bottom Layer w0.406: v1(23.9,75.3) 23.9,77.6 38.1,91.8 45.992,91.8 48.142,93.95
BTN_CHIP_EN: 1µF.1@50.642,76.3 10kΩ.1@46.092,72.775 "ESP32 EN.1" ESP32-C3-MINI-1-N4.8 | length 20.3
  Top Layer w0.406: ESP32-C3-MINI-1-N4.8 40.825,69.025 44.6,72.8 46.067,72.8 46.092,72.775 46.156,72.711 47.143,72.711 47.933,73.5 47.933,73.941 48.351,74.359 48.901,74.359 50.642,76.1 1µF.1@50.642,76.3
CROSSOVER_POT: Crossover.2 ESP32-C3-MINI-1-N4.13 | length 20.3
  Top Layer w0.406: v1(31.9,76.3) 31.925,76.275 ESP32-C3-MINI-1-N4.13 ; v1(34,77.9) 37.9,81.8 Crossover.2
  Bottom Layer w0.406: v1(31.9,76.3) 31.907,76.307 31.907,76.907 32.9,77.9 v1(34,77.9)
DIN: ESP32-C3-MINI-1-N4.20 TM8211.3 | length 40.6
  Top Layer w0.406: v1(26.3,75.9) 26.322,75.878 26.322,72.328 ESP32-C3-MINI-1-N4.20 ; v1(47.5,81.6) 51.389,81.6 51.827,81.162 TM8211.3
  Bottom Layer w0.406: v1(26.3,75.9) 26.3,77 31.9,82.6 40.1,82.6 43.8,86.3 46.5,86.3 47.5,85.3 v1(47.5,81.6)
GND: 1µF.1@37.55,65 1µF.2@52.542,76.3 4.7nF.2 4.7µF.2 5.1kΩ.1@12.667,71 5.1kΩ.2@12.675,74.9 10kΩ.1@19.292,84.725 10µF.1 "3.5mm Audio Jack.1" "220µF 6.3x7.7.2" "Base Volume.1" "ESP32 BOOT.3" "ESP32 BOOT.4" "ESP32 EN.3" "ESP32 EN.4" "Treble Volume.1" <.1 AP2112K-3.3TRG1.2 C17.1 Crossover.3 Crossover.S1 Crossover.S2 ESP32-C3-MINI-1-N4.1 ESP32-C3-MINI-1-N4.2 ESP32-C3-MINI-1-N4.11 ESP32-C3-MINI-1-N4.14 ESP32-C3-MINI-1-N4.36 ESP32-C3-MINI-1-N4.37 ESP32-C3-MINI-1-N4.38 ESP32-C3-MINI-1-N4.39 ESP32-C3-MINI-1-N4.40 ESP32-C3-MINI-1-N4.41 ESP32-C3-MINI-1-N4.42 ESP32-C3-MINI-1-N4.43 ESP32-C3-MINI-1-N4.44 ESP32-C3-MINI-1-N4.45 ESP32-C3-MINI-1-N4.46 ESP32-C3-MINI-1-N4.47 ESP32-C3-MINI-1-N4.48 ESP32-C3-MINI-1-N4.49_1 ESP32-C3-MINI-1-N4.49_2 ESP32-C3-MINI-1-N4.49_3 ESP32-C3-MINI-1-N4.49_4 ESP32-C3-MINI-1-N4.49_5 ESP32-C3-MINI-1-N4.49_6 ESP32-C3-MINI-1-N4.49_7 ESP32-C3-MINI-1-N4.49_8 ESP32-C3-MINI-1-N4.49_9 ESP32-C3-MINI-1-N4.50 ESP32-C3-MINI-1-N4.51 ESP32-C3-MINI-1-N4.52 ESP32-C3-MINI-1-N4.53 J1.A1_B12 J1.B1_A12 J1.S1 J1.S2 J1.S3 J1.S4 NS8002.7 TM8211.4 | length 33.5
  Top Layer w0.406: J1.S2 8.524,68.675 8.752,68.903 8.752,69.703 8.849,69.8 J1.B1_A12 12.187,69.8 12.425,70.038 12.425,70.758 5.1kΩ.1@12.667,71 ; J1.S1 8.524,77.325 8.752,77.097 8.752,76.297 8.849,76.2 J1.A1_B12 ; 5.1kΩ.2@12.675,74.9 13.793,74.9 13.993,75.1 v1(14.1,75.1) ; ESP32-C3-MINI-1-N4.37 23.925,63.425 ESP32-C3-MINI-1-N4.49_3 ESP32-C3-MINI-1-N4.49_2 ESP32-C3-MINI-1-N4.42 ; ESP32-C3-MINI-1-N4.49_5 ESP32-C3-MINI-1-N4.49_4 ESP32-C3-MINI-1-N4.49_9 ; ESP32-C3-MINI-1-N4.49_8 ESP32-C3-MINI-1-N4.49_1 31.125,64.225 ESP32-C3-MINI-1-N4.2 ; ESP32-C3-MINI-1-N4.49_7 31.125,70.625 ESP32-C3-MINI-1-N4.14
  Top Layer w0.457: ESP32-C3-MINI-1-N4.49_6 ESP32-C3-MINI-1-N4.49_7
NetC3_1: 1µF.1@17.892,88.55 2.2kΩ.2@21.417,89.6 10kΩ.1@19.292,92.725 10kΩ.2@19.292,86.475 | length 10.1
  Top Layer w0.559: 1µF.1@17.892,88.55 18.092,88.55 19.3,87.342 ; 10kΩ.2@19.292,86.475 19.3,86.483 19.3,87.342 ; 10kΩ.1@19.292,92.725 19.488,92.529 19.771,92.529 21.417,90.883 21.417,89.395 19.364,87.342 19.3,87.342
NetC3_2: 1kΩ.2@16.092,86.475 1kΩ.2@16.092,92.7 1µF.2@17.892,90.45 | length 8.7
  Top Layer w0.559: 1kΩ.2@16.092,86.475 16.092,88.85 ; 1kΩ.2@16.092,92.7 16.092,88.85 ; 1µF.2@17.892,90.45 17.692,90.45 16.092,88.85
NetC6_1: 1µF.1@58.992,86.25 "Treble Volume.3" | length 19.6
  Top Layer w0.559: 1µF.1@58.992,86.25 58.992,88.192 66.494,95.694 73.572,95.694
NetC6_2: 1kΩ.1@56.867,84.6 1µF.2@58.992,84.35 4.7nF.1@61.042,84.6 | length 4.4
  Top Layer w0.406: 1kΩ.1@56.867,84.6 58.542,84.6 58.792,84.35 58.992,84.35 60.795,84.35 61.042,84.597 4.7nF.1@61.042,84.6
NetC7_1: 1µF.1@58.892,77.1 "Base Volume.3" | length 17.3
  Top Layer w0.559: 1µF.1@58.892,77.1 58.892,75.408 61.103,73.197 73.572,73.197
NetC7_2: 1kΩ.1@56.867,78.8 1µF.2@58.892,79 4.7nF.1@60.942,78.8 | length 4.2
  Top Layer w0.406: 1kΩ.1@56.867,78.8 57.067,79 58.892,79 60.742,79 4.7nF.1@60.942,78.8
NetC8_1: 4.7µF.1@81.592,65.35 NS8002.2@80.157,68.075 NS8002.3@81.427,68.075 | length 4.1
  Top Layer w0.559: NS8002.2@80.157,68.075 81.427,68.075 81.435,68.067 81.435,65.507 4.7µF.1@81.592,65.35
NetC9_1: 4.7µF.1@81.365,87.981 NS8002.2@80.008,90.141 NS8002.3@81.278,90.141 | length 3.5
  Top Layer w0.406: NS8002.2@80.008,90.141 81.278,90.141 81.278,88.068 4.7µF.1@81.365,87.981
NetC12_2: 1µF.2@76.328,71.953 15kΩ.1@76.358,69.449 | length 2.5
  Top Layer w0.559: 1µF.2@76.328,71.953 76.343,71.938 76.343,69.464 15kΩ.1@76.358,69.449
NetC13_2: 1µF.2@76.328,94.344 15kΩ.1@76.358,91.442 | length 2.9
  Top Layer w0.559: 1µF.2@76.328,94.344 76.343,94.329 76.343,91.457 15kΩ.1@76.358,91.442
NetD1_2: 2.2kΩ.2@7.417,65.6 <.2@5.892,65.6 | length 1.5
  Top Layer w0.406: <.2@5.892,65.6 2.2kΩ.2@7.417,65.6
NetD2_2: 1kΩ.2@7.407,80.4 <.2@5.292,80.4 | length 2.1
  Top Layer w0.406: <.2@5.292,80.4 1kΩ.2@7.407,80.4
NetJ1_A5: 5.1kΩ.1@10.925,74.9 J1.A5 | length 2.2
  Top Layer w0.305: J1.A5 9.044,74.252 9.752,74.252 10.4,74.9 5.1kΩ.1@10.925,74.9
NetJ1_B5: 5.1kΩ.2@10.917,71 J1.B5 | length 2
  Top Layer w0.305: J1.B5 9.044,71.248 9.852,71.248 10.1,71 5.1kΩ.2@10.917,71
"NetNS8002 Base_4": 15kΩ.2@76.358,67.699 20kΩ.1@85.067,69.925 NS8002.4@82.697,68.075 | length 16.9
  Top Layer w0.559: 15kΩ.2@76.358,67.699 76.563,67.699 79.862,64.4 83.9,64.4 84.7,65.2 84.7,67.95 84.575,68.075 ; NS8002.4@82.697,68.075 84.575,68.075 ; 20kΩ.1@85.067,69.925 85,69.858 85,68.5 84.575,68.075
"NetNS8002 Base_5": 20kΩ.2@85.067,71.675 Base+.1 NS8002.5@82.697,73.525 | length 22.5
  Top Layer w0.559: NS8002.5@82.697,73.525 84.475,73.525 85.067,72.933 ; 20kΩ.2@85.067,71.675 85.067,72.933 ; v2(86.6,73.6) 86.464,73.464 85.598,73.464 85.067,72.933 ; v2(90.4,73.5) 90.4,73.4 91.6,72.2 91.6,67 Base+.1
  Bottom Layer w0.559: v2(86.6,73.6) 86.65,73.55 90.35,73.55 v2(90.4,73.5)
"NetNS8002 Base_8": Base-.1 NS8002.8@78.887,73.525 | length 39.5
  Top Layer w0.559: NS8002.8@78.887,73.525 78.887,71.313 80.2,70 v2(82.9,70) ; v2(86.1,66.8) 86.1,58.8 93.3,51.6 93.3,47.4 96,44.7 Base-.1
  Bottom Layer w0.559: v2(82.9,70) v2(86.1,66.8)
"NetNS8002 Treble_4": 15kΩ.2@76.358,89.692 20kΩ.1@84.895,91.991 NS8002.4@82.548,90.141 | length 15.1
  Top Layer w0.406: 20kΩ.1@84.895,91.991 20kΩ.1@84.9,91.986
  Top Layer w0.559: 15kΩ.2@76.358,89.692 76.358,88.642 78,87 82.095,87 84.041,88.946 84.041,90.141 ; NS8002.4@82.548,90.141 84.041,90.141 ; 20kΩ.1@84.9,91.986 84.9,91 84.041,90.141
"NetNS8002 Treble_5": 20kΩ.2@84.895,93.741 NS8002.5@82.548,95.591 Treble+.1 | length 33.9
  Top Layer w0.559: NS8002.5@82.548,95.591 84.409,95.591 ; 20kΩ.2@84.895,93.741 84.9,93.746 84.9,95.1 84.409,95.591 ; v2(86.8,99.4) 86.8,97.981 84.409,95.591 ; v2(90.9,108.2) 92,109.3 92,113.5 95,116.5 95,119.275 96.1,120.375 Treble+.1
  Bottom Layer w0.559: v2(86.8,99.4) 86.8,104.1 v2@90.8,108.1
"NetNS8002 Treble_8": NS8002.8@78.738,95.591 Treble-.1 | length 21.1
  Top Layer w0.559: NS8002.8@78.738,95.591 78.738,98.838 80.9,101 95.6,101 Treble-.1
"NetPJ-320B Audio Jack_2": 1kΩ.1@16.092,94.45 "3.5mm Audio Jack.2" | length 9
  Top Layer w0.559: 7.114,94.385 7.179,94.45 1kΩ.1@16.092,94.45
"NetPJ-320B Audio Jack_3": 1kΩ.1@16.092,84.725 "3.5mm Audio Jack.3" | length 3.8
  Top Layer w0.559: 12.258,84.733 12.266,84.725 1kΩ.1@16.092,84.725
NetR16_2: 1kΩ.2@55.117,78.8 TM8211.8 | length 10.8
  Top Layer w0.406: TM8211.8 49.293,84.493 49.293,82.707 v1(49.3,82.7) ; v1(55.1,81) 55.108,80.992 55.108,78.808 1kΩ.2@55.117,78.8
  Bottom Layer w0.406: v1(49.3,82.7) 49.3,82.3 50.545,81.055 55.045,81.055 v1(55.1,81)
NetR17_2: 1kΩ.2@55.117,84.6 TM8211.6 | length 6.1
  Top Layer w0.406: TM8211.6 51.874,84.453 51.874,83.433 52.1,83.207 v1(52.1,83.1) ; 1kΩ.2@55.117,84.6 55.158,84.558 55.158,83.142 v1(55.2,83.1)
  Bottom Layer w0.406: v1(52.1,83.1) v1(55.2,83.1)
USB_N: ESP32-C3-MINI-1-N4.26 J1.A7 J1.B7 | length 17.2
  Top Layer w0.305: J1.A7 8.279,72.75 8.1,72.929 8.1,73.571 8.279,73.75 J1.B7 12.35,73.75 14,72.1 14,71.6 14.975,70.625 ESP32-C3-MINI-1-N4.26
USB_P: ESP32-C3-MINI-1-N4.27 J1.A6 J1.B6 | length 17.8
  Top Layer w0.305: J1.B6 9.044,72.252 9.695,72.252 9.917,72.474 ; J1.A6 9.044,73.248 9.738,73.248 9.917,73.069 9.917,72.474 ; ESP32-C3-MINI-1-N4.27 20,69.825 19.372,69.825 ccw(c19.372,69.52) 19.067,69.52 19.067,69.152 cw(c19.052,69.152) 19.052,69.136 18.777,69.136 cw(c18.777,69.152) 18.762,69.152 18.762,70.153 ccw(c18.747,70.153) 18.747,70.168 18.472,70.168 ccw(c18.472,70.153) 18.457,70.153 18.457,70.13 cw(c18.152,70.13) 18.152,69.825 18,69.825 15.128,69.825 13.543,71.411 13.543,71.857 12.926,72.474 9.917,72.474
WS: ESP32-C3-MINI-1-N4.19 TM8211.2 | length 40
  Top Layer w0.406: ESP32-C3-MINI-1-N4.19 27.125,75.818 27.65,76.343 v1(27.65,76.45) ; v1(45,76.7) 48.732,76.7 50.557,78.525 TM8211.2
  Bottom Layer w0.406: v1(27.65,76.45) 30.8,79.6 35.5,79.6 35.703,79.6 ccw(c35.703,80.006) 36.11,80.006 36.11,80.498 cw(c36.13,80.498) 36.13,80.519 36.496,80.519 cw(c36.496,80.498) 36.516,80.498 36.516,78.941 ccw(c36.536,78.941) 36.536,78.921 36.902,78.921 ccw(c36.902,78.941) 36.922,78.941 36.922,80.497 cw(c36.943,80.497) 36.943,80.518 37.308,80.518 cw(c37.308,80.497) 37.329,80.497 37.329,78.94 ccw(c37.349,78.94) 37.349,78.92 37.715,78.92 ccw(c37.715,78.94) 37.735,78.94 37.735,80.496 cw(c37.756,80.496) 37.756,80.517 38.121,80.517 cw(c38.121,80.496) 38.142,80.496 38.142,78.939 ccw(c38.162,78.939) 38.162,78.919 38.528,78.919 ccw(c38.528,78.939) 38.548,78.939 38.548,79.194 cw(c38.954,79.194) 38.954,79.6 39.639,79.6 42.1,79.6 v1(45,76.7)
pads on no net: "Base Volume.S1" "Base Volume.S2" "ESP32 BOOT.2" "ESP32 EN.2" "Treble Volume.S1" "Treble Volume.S2" AP2112K-3.3TRG1.4 ESP32-C3-MINI-1-N4.4 ESP32-C3-MINI-1-N4.5 ESP32-C3-MINI-1-N4.7 ESP32-C3-MINI-1-N4.9 ESP32-C3-MINI-1-N4.10 ESP32-C3-MINI-1-N4.15 ESP32-C3-MINI-1-N4.16 ESP32-C3-MINI-1-N4.17 ESP32-C3-MINI-1-N4.21 ESP32-C3-MINI-1-N4.22 ESP32-C3-MINI-1-N4.24 ESP32-C3-MINI-1-N4.25 ESP32-C3-MINI-1-N4.28 ESP32-C3-MINI-1-N4.29 ESP32-C3-MINI-1-N4.30 ESP32-C3-MINI-1-N4.31 ESP32-C3-MINI-1-N4.32 ESP32-C3-MINI-1-N4.33 ESP32-C3-MINI-1-N4.34 ESP32-C3-MINI-1-N4.35 J1. J1.A8 J1.B8 TM8211.7

## Polygon pours and split planes (outlines as drawn)
GND on Top Layer "NONET_L-01_P-001" (solid, shelved, pour order 0): 0,102.668 103.152,134.148 104.377,28.677 0,58.668
GND on Bottom Layer "NONET_L-01_P-001" (solid, shelved, pour order 1): 0,102.551 103.302,134.298 104.527,28.527 0,58.551

## Silkscreen, mask and mechanical layers (free items; w line width, h text height)
Mechanical 1:
  lines w0.254: 86.485,81.312 86.485,82.474 cw(c87.812,82.495) 87.793,83.822 99.74,83.797 ccw(c99.72,85.208) 101.131,85.231 101.131,88.433 101.131,96.069 ; 86.492,81.305 ccw(c87.819,81.284) 87.8,79.957 99.696,79.957 cw(c99.676,78.505) 101.127,78.482 101.129,75.284 101.129,67.653 ccw(c114.999,53.245) 101.182,38.785 ; 101.047,124.969 ccw(c114.917,110.56) 101.1,96.1 ; 101.101,125.023 101.101,131.543 ccw(c101.192,126.24) 95.932,126.929 95.733,125.605 cw(c68.189,129.527) 68.709,101.71 5.172,101.68 ccw(c5.172,98.7) 2.192,98.7 2.192,64.5 ccw(c5.012,64.5) 5.012,61.68 67.41,61.689 cw(c66.864,32.437) 95.828,36.561 ccw(c101.203,37.296) 101.183,31.872 101.183,38.784

## Text inside footprints (layer, text, board x,y; h text height)
"220µF 6.3x7.7": Top Overlay "+" at 86.65,71.3 h1.22 r180
"220µF 6.3x7.7": Top Overlay "+" at 86.722,93.366 h1.22 r180
<: Top Overlay "+" at 6.592,80.1 h0.76 r90
<: Top Overlay "+" at 7.192,65.3 h0.76 r90
J1: Mechanical 13 "PCB EDGE" at 2.392,67.8 h0.61 r270